# Altium PCB Main.PcbDoc
Units mm, origin at the board's own origin, x right, y up, seen from the top; angles counter-clockwise.
Board outline 30.8 x 30.8 mm, 2 copper layers (Top Layer, Bottom Layer); 34 components, 43 nets, 119 pads, 73 vias.
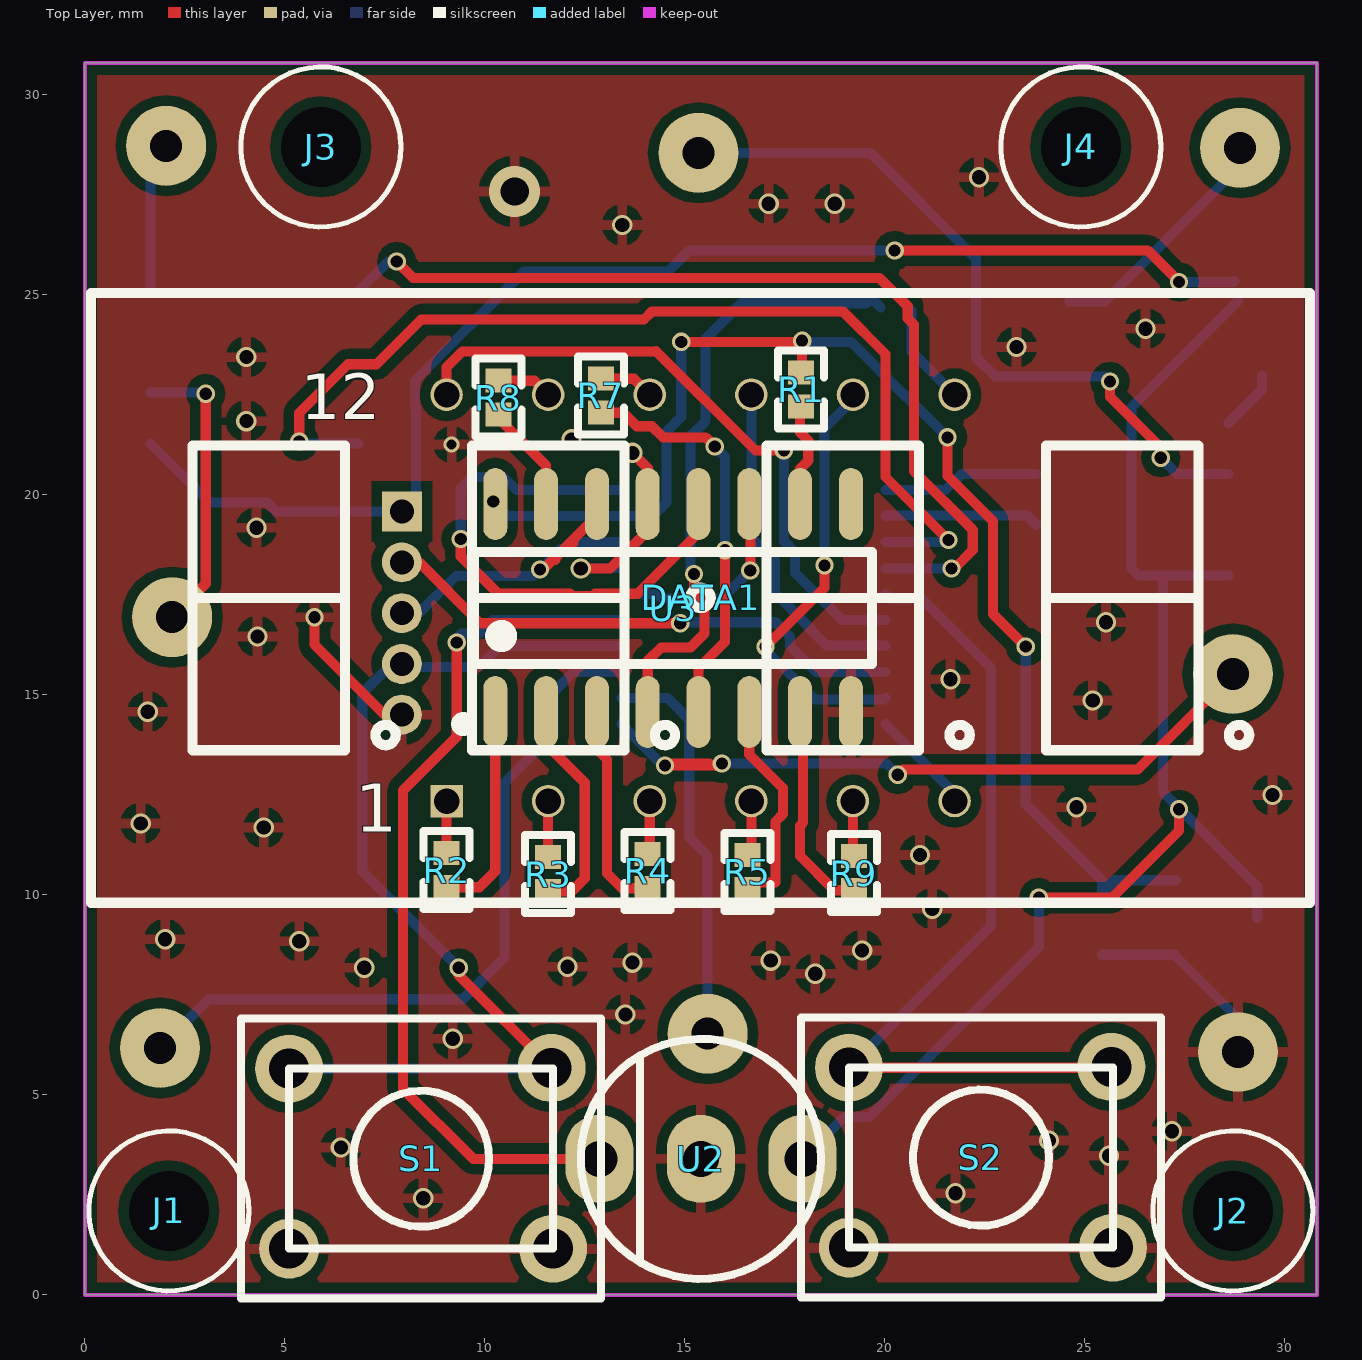
[diagram p0: Top Layer view]
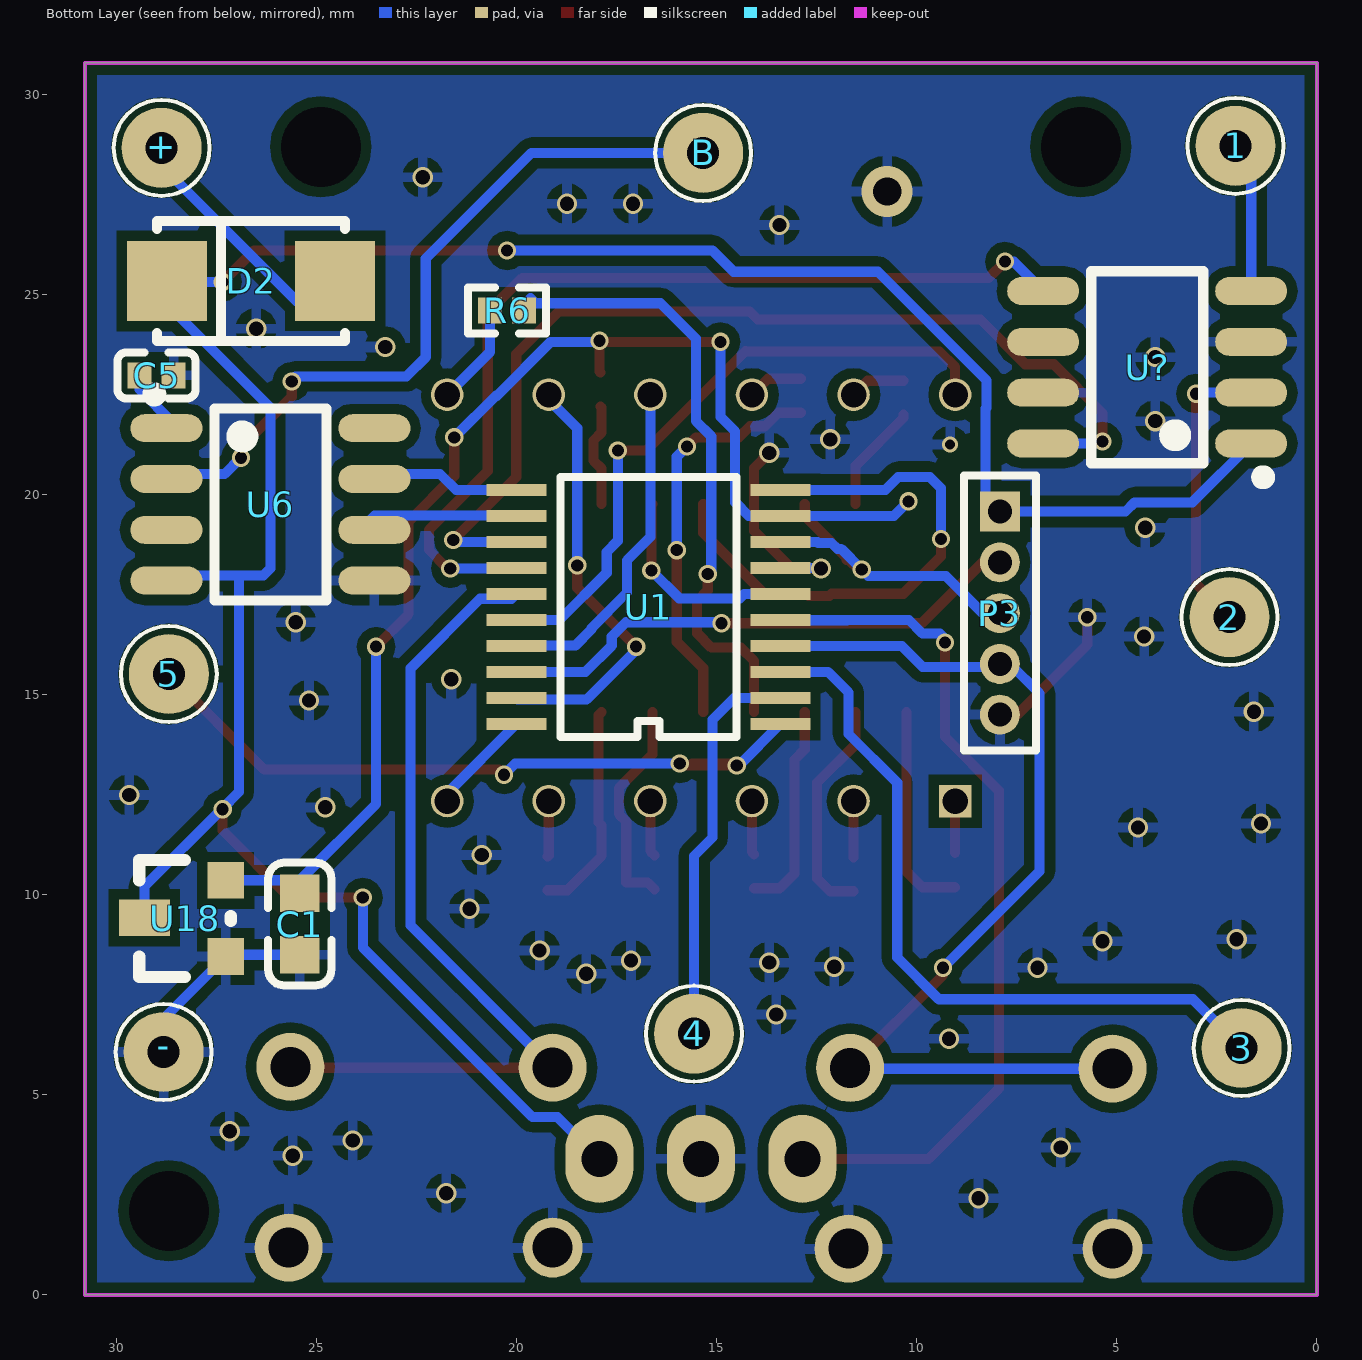
[diagram p1: Bottom Layer view, seen from below]
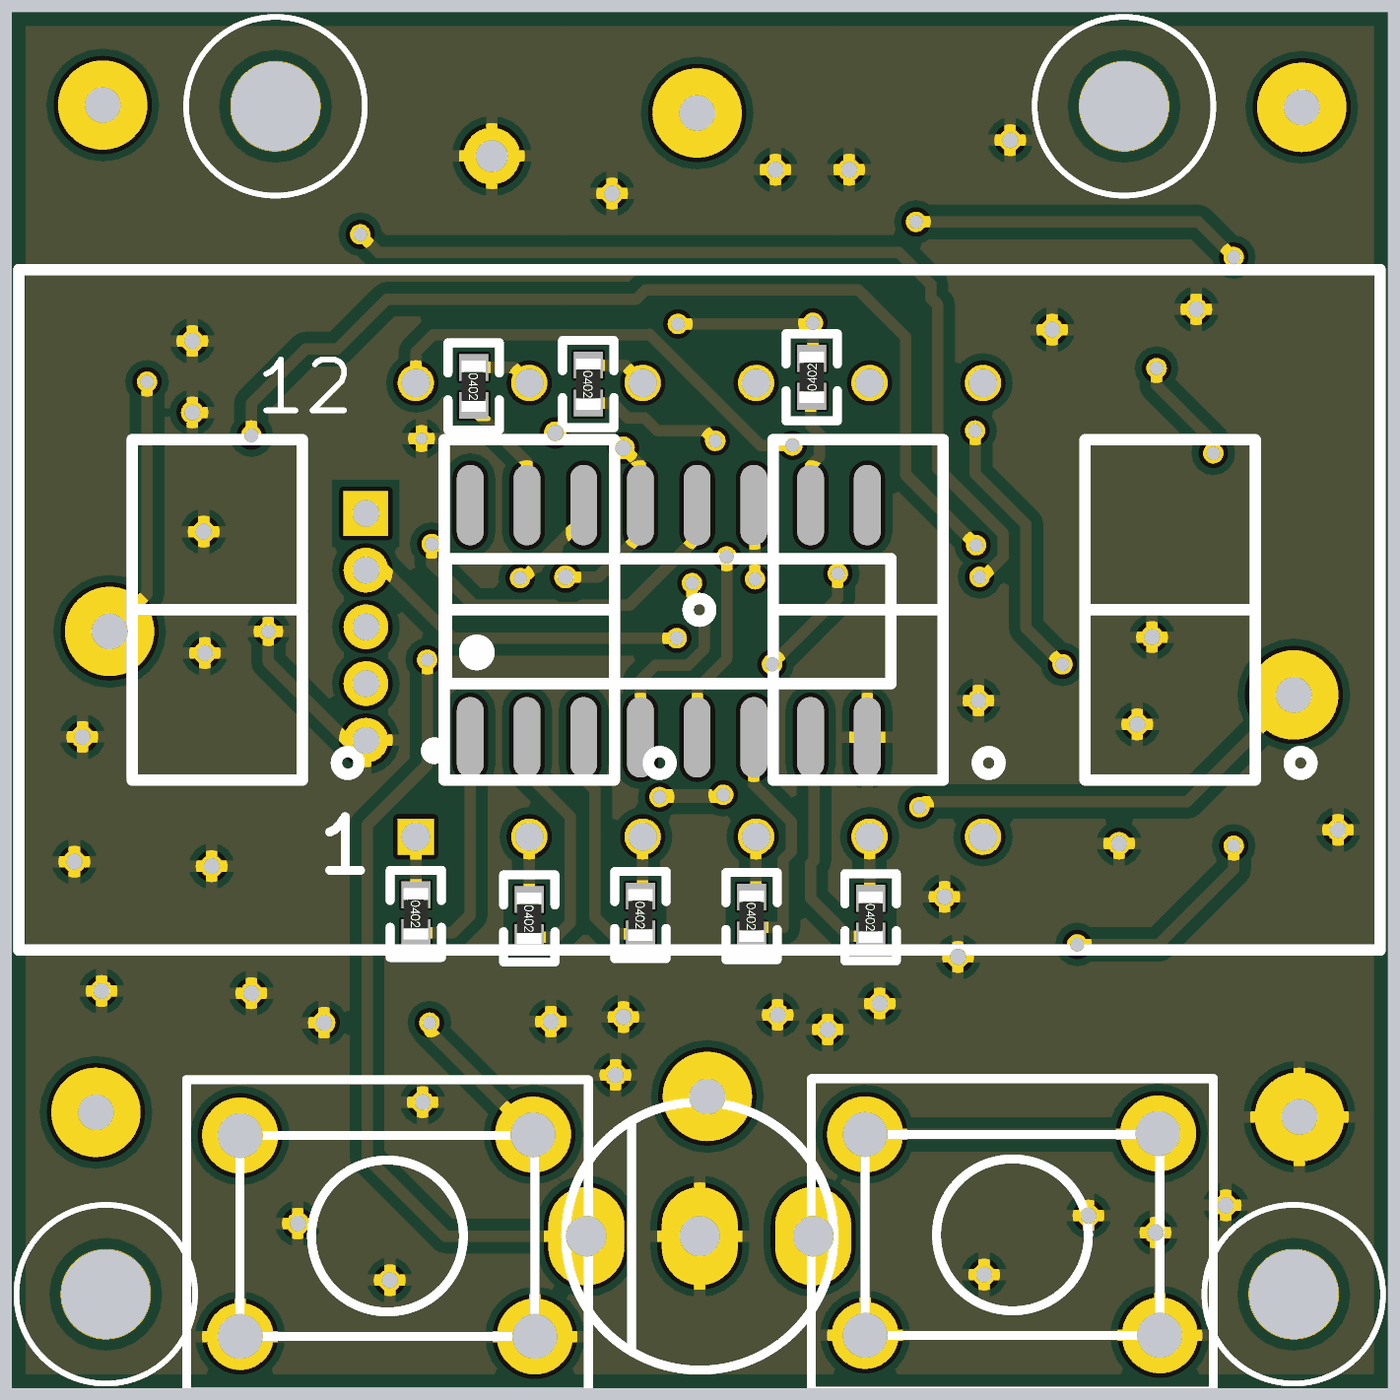
[diagram p2: 3D render of the assembled board from above, using the file's embedded part models]

## Layer stack, top to bottom
Top Solder: solder mask 0.0102, Solder Resist, Dk 3.5
Top Layer: signal copper 0.0356
Dielectric 1: dielectric 0.32, FR-4, Dk 4.8
Bottom Layer: signal copper 0.0356
Bottom Solder: solder mask 0.0102, Solder Resist, Dk 3.5

## Board outline
0,30.8 30.8,30.8 30.8,0 0,0

## Design rules (kind name [scope] priority, off if disabled: settings)
Clearance [All] p1: gap=0.254
PolygonConnect [All] p1: connectstyle=Relief reliefconductorwidth=0.254 reliefentries=4 polygonreliefangle="90 Angle" airgapwidth=0.254
RoutingVias [All] p1: holewidth=0.305 width=0.457 viastyle="Through Hole" minholewidth=0.305 minwidth=0.457 maxholewidth=0.305 maxwidth=0.457
SolderMaskExpansion [All] p1: expansion=0.102
Width [All] p1: maxlimit=0.254 minlimit=0.254 preferedwidth=0.254
30 further rules are at their usual default settings.

## Components (designator, comment, footprint, x,y, rotation, side; value= is the part's Value field where it differs from the comment)
1 "Socket" MODULE-PAD$2F$3 2.032,28.727 r180 bottom
2 "Socket" MODULE-PAD$2F$3 2.184,16.942 r180 bottom
3 "Socket" MODULE-PAD$2F$3 1.88,6.172 r180 bottom
4 "Socket" MODULE-PAD$2F$3 15.57,6.528 r180 bottom
5 "Socket" MODULE-PAD$2F$3 28.702,15.519 r180 bottom
+ "Socket" MODULE-PAD$2F$3 28.88,28.677 r180 bottom
- "Socket" MODULE-PAD$2F$3 28.829,6.071 r180 bottom
B "Socket" MODULE-PAD$2F$3 15.342,28.55 r180 bottom
C1 "10uF (106) 10% 10V" 0603_C 25.425,9.271 r90 bottom
C5 "100nF (104) 10% 16V" 0402_C 29.007,22.987 r180 bottom
D2 "SS54" SMA(DO-214AC)_S1 26.645,25.349 r180 bottom
DATA1 "LN3461AX" DIP12:DISP2 15.392,17.424 r0 top
J1 "Socket" FPAD_1 2.1,2.1 r0 top
J2 "Socket" FPAD_1 28.7,2.1 r0 top
J3 "Socket" FPAD_1 5.9,28.7 r0 top
J4 "Socket" FPAD_1 24.9,28.7 r0 top
P3 "MHDR1X5" MHDR1X5 7.925,19.583 r270 bottom
R1 "2.2KΩ (2201) ±1%" 0402_R 17.907,22.631 r90 top
R2 "1k" 0402_R 9.042,10.617 r270 top
R3 "1k" 0402_R 11.582,10.516 r270 top
R4 "1k" 0402_R 14.072,10.592 r270 top
R5 "1k" 0402_R 16.561,10.566 r270 top
R6 "1k" 0402_R 20.244,24.613 r180 bottom
R7 "1k" 0402_R 12.903,22.479 r270 top
R8 "1k" 0402_R 10.338,22.428 r270 top
R9 "1k" 0402_R 19.228,10.541 r270 top
S1 "SW-PB" SB1$2F$2 8.407,3.404 r270 top
S2 "SW-PB" SB1$2F$2 22.403,3.429 r270 top
U1 "N76E003AQ20" TSSOP20 16.713,17.196 r0 bottom
U2 "VS1838" LF0038Q 15.4,3.4 r0 top
U3 "74HC595D" SOIC-16_150mil 14.707,17.17 r0 top
U6 "JQ" SOIC-8_150mil 26.162,19.761 r270 bottom
U18 "AP2121-3.3" SOT-23 27.28,8.458 r270 bottom
U? "MX6208" SOIC-8_150mil 4.242,23.19 r90 bottom

## Footprints (in the part's own frame and the unit in brackets; to place one, negate y for a bottom-side part, rotate by r counter-clockwise, add the part's x,y. Pads: shape width x height; smd on the part's side, far side on the other; paste and mask are expansions set on the pad)
0402_C [mm]
  rect 0.6x0.65 smd mask+0.051: 1(-0.425,0) 2(0.425,0)
  silkscreen extent -0.97,-0.58 0.97,0.58, body extent -0.48,-0.3 0.52,0.3, height 0.2
0402_R [mm]
  rect 0.6x0.65 smd mask+0.051: 1(-0.425,0) 2(0.425,0)
  silkscreen extent -0.97,-0.58 0.97,0.58, body extent -0.58,-0.27 0.58,0.28, height 0.41
0603_C [mm]
  rect 0.93x0.98 smd: 1(-0.77,0) 2(0.77,0)
  silkscreen extent -1.53,-0.79 1.54,0.79, body extent -0.8,-0.4 0.8,0.4, height 0.3
DIP12:DISP2 [mil]
  rect 32x32 hole 25: 1(-250,-200)
  round 32 hole 25: 2(-150,-200) 3(-50,-200) 4(50,-200) 5(150,-200) 6(250,-200) 7(250,200) 8(150,200) 9(50,200) 10(-50,200) 11(-150,200) 12(-250,200)
  silkscreen extent -600,-300 600,300
FPAD_1 [mil]
  round 60 hole 78.74: 1(0,0)
LF0038Q [mm]
  oval 1.7x2.2 hole 0.9: 1(-2.54,0) 2(0,0) 3(2.54,0)
  silkscreen extent -3,-3 3,3
MHDR1X5 [mm] "Connector; Header; 5 Position"
  rect 1x1 hole 0.6: 1(0,0)
  round 1 hole 0.6: 2(1.27,0) 3(2.54,0) 4(3.81,0) 5(5.08,0)
  silkscreen extent -0.9,-0.9 5.98,0.9
MODULE-PAD$2F$3 [mm]
  round 2 hole 0.8: 1(0,0)
  silkscreen extent -1.2,-1.2 1.2,1.2
SB1$2F$2 [mm]
  round 1.7 hole 1: 1(-2.27,3.26) 1(-2.25,-3.3) 2(2.25,3.3)
  round 1.5 hole 1: 2(2.25,-3.3)
  silkscreen extent -3.5,-4.5 3.5,4.5
SMA(DO-214AC)_S1 [mm]
  rect 2x2 smd: 1(2.1,0) 2(-2.1,0)
  silkscreen extent -2.35,-1.5 2.35,1.5
SOIC-8_150mil [mm] "SOIC, 8-Leads, Body 4.9x3.9mm, Pitch 1.27mm, IPC Medium Density"
  oval 0.7x1.8 smd: 1(-1.905,-2.6) 2(-0.635,-2.6) 3(0.635,-2.6) 4(1.905,-2.6) 5(1.905,2.6) 6(0.635,2.6) 7(-0.635,2.6) 8(-1.905,2.6)
  silkscreen extent -2.9,-3.05 2.4,1.4
SOIC-16_150mil [mm]
  oval 0.6x1.8 smd: 1(-4.445,-2.6) 2(-3.175,-2.6) 3(-1.905,-2.6) 4(-0.635,-2.6) 5(0.635,-2.6) 6(1.905,-2.6) 7(3.175,-2.6) 8(4.445,-2.6) 9(4.445,2.6) 10(3.175,2.6) 11(1.905,2.6) 12(0.635,2.6) 13(-0.635,2.6) 14(-1.905,2.6) 15(-3.175,2.6) 16(-4.445,2.6)
  silkscreen extent -5.4,-3.05 4.97,1.4
SOT-23 [mil]
  rect 36x36 smd: 1(0,0) 2(-75,0)
  rect 36x50 smd: 3(-38,-80)
  silkscreen extent -95,-85 20,5, body extent -94,-89 24,9, height 42
TSSOP20 [mm]
  rect 1.5x0.3 smd: 1(-3.3,2.925) 2(-3.3,2.275) 3(-3.3,1.625) 4(-3.3,0.975) 5(-3.3,0.325) 6(-3.3,-0.325) 7(-3.3,-0.975) 8(-3.3,-1.625) 9(-3.3,-2.275) 10(-3.3,-2.925) 11(3.3,-2.925) 12(3.3,-2.275) 13(3.3,-1.625) 14(3.3,-0.975) 15(3.3,-0.325) 16(3.3,0.325) 17(3.3,0.975) 18(3.3,1.625) 19(3.3,2.275) 20(3.3,2.925)
  silkscreen extent -2.2,-3.25 2.2,3.25

## Part data
C1: library part "0603 10uF (106) 10% 10V", "贴片电容"
C5: library part "0402 100nF (104) 10% 16V", "贴片电容"
D2: library part "SMA(DO-214AC) SS54", "二极管"
DATA1: library part DATA04, "data?"
P3: "Header, 5-Pin"
R1 R2 R3 R4 R5 R6 R7 R8 R9: library part "0402 2.2KΩ (2201) 1%", "贴片电阻"
S1 S2: "Switch"
U2: library part RF, "1838 接收头 VS1838 VS1838B"
U3: "74系列逻辑芯片"
U18: library part AP2121-3, "3V LDO"

## Via types
v1: diameter 0.508, hole 0.356, Top Layer to Bottom Layer, 39 vias
v2: diameter 0.457, hole 0.305, Top Layer to Bottom Layer, 32 vias
v3: diameter 0.4, hole 0.254, Top Layer to Bottom Layer, 1 vias
v4: diameter 1.27, hole 0.711, Top Layer to Bottom Layer, 1 vias

## Nets (pads, with @x,y where several pads share a name; then routed paths per layer and width w, separated by ;. In a path a pad name is that pad's centre, name@x,y a point inside that pad or via, vN(x,y) a via of type N, cw(c..) or ccw(c..) an arc to the next point about the centre after c; other vN are vias at no path point)
+3V: C1.2 R1.2 U1.9 U3.16 U18.2 | length 32.2
  Top Layer w0.254: v2(14.91,23.825) 17.907,23.825 v2(17.932,23.851) 17.932,23.082 R1.2 ; v2(21.565,21.438) 21.565,20.477 22.706,19.335 22.706,17.019 v2(23.52,16.205)
  Bottom Layer w0.254: v2(10.211,19.837) 10.577,19.471 U1.9 14.202,19.471 14.544,19.813 14.544,21.586 14.91,21.951 v2(14.91,23.825) ; v2(17.932,23.851) 17.958,23.825 19.152,23.825 20.498,22.479 20.523,22.479 v2(21.565,21.438) ; v2(23.52,16.205) 23.52,12.268 25.425,10.363 C1.2 25.748,10.363 U18.2
+3V3: D2.2 P3.1 U2.3 U6.4 U18.3 U?.1 | length 66.5
  Top Layer w0.254: v2(20.244,26.111) 26.568,26.111 v2(27.356,25.324) ; v2(23.851,9.931) 25.679,9.931 27.356,11.608 v2(27.356,12.141)
  Bottom Layer w0.254: U?.1 3.115,19.812 4.556,19.812 4.784,19.583 P3.1 8.28,19.939 8.28,22.153 8.255,22.178 8.255,22.86 10.973,25.578 14.58,25.578 15.113,26.111 v2(20.244,26.111) ; U2.3 18.988,4.448 19.613,4.448 23.851,8.686 v2(23.851,9.931) ; v2(27.356,12.141) v2@27.368,12.154 ; v2(27.356,25.324) 28.719,25.324 D2.2 ; U6.4@28.587,17.983 26.949,17.983 ; D2.2@28.821,24.841 26.162,22.182 26.162,18.161 26.34,17.983 26.949,17.983 ; U18.3 29.312,10.211 v2@27.368,12.154 ; 26.949,17.983 26.949,12.573 v2@27.368,12.154
CLK: P3.2 U1.18 | length 13.4
  Top Layer w0.254: P3.2 8.357,18.313 9.881,16.789 v2(14.884,16.789)
  Bottom Layer w0.254: v2(14.884,16.789) 14.91,16.815 17.271,16.815 17.628,16.458 17.628,16.231 18.287,15.571 U1.18
DAT: P3.3 U1.8 U3.14 | length 9.6
  Top Layer w0.254: v2(11.379,18.136) v2@11.46,18.136 ; 12.213,18.796 12.132,18.796 11.76,18.424 11.76,18.375 11.699,18.375 v2@11.46,18.136 ; U3.14 12.802,19.477 v2@11.46,18.136
  Bottom Layer w0.254: P3.3 8.351,17.043 9.278,17.97 11.214,17.97 v2(11.379,18.136) 11.892,18.649 11.985,18.649 12.132,18.796 12.467,18.796 12.492,18.821 U1.8
GND: -.1 C1.1 C5.2 P3.5 S1.2 S2.2 U1.7 U2.2 U3.8 U3.13 U6.5 U18.1 U?.3 U?.7 | length 13.8
  Top Layer w0.254: v2(5.74,16.942) 5.74,16.256 7.493,14.503 P3.5 ; v1@12.344,18.136 12.37,18.161 v1(12.395,18.161) 13.132,18.161 14.072,19.101 U3.13 14.072,20.668 v1(13.691,21.049)
  Bottom Layer w0.254: v2@5.74,16.916 v2(5.74,16.942) ; v1(12.395,18.161) 12.405,18.171 U1.7 ; C1.1 27.237,8.501 U18.1 28.829,6.909 -.1
  other v1: 8.458,2.413 21.768,2.54 25.603,3.48 6.401,3.683 24.105,3.861 27.178,4.089 9.195,6.401 13.513,7.01 18.263,8.026 6.985,8.179 12.065,8.204 13.691,8.306 17.145,8.357 19.431,8.611 5.359,8.839 2.007,8.89 21.184,9.652 20.879,10.998 4.47,11.684 1.397,11.786 24.79,12.192 29.693,12.497 1.575,14.58 25.197,14.859 21.641,15.392 4.318,16.459 25.527,16.815 4.293,19.177 12.167,21.387 4.039,21.844 4.039,23.444 23.292,23.698 26.518,24.155 13.437,26.746 17.094,27.28 18.745,27.28 22.352,27.94
  other v3: 9.169,21.26
  other v4: 10.744,27.584
INT0: U1.5 U2.1 | length 21.8
  Top Layer w0.254: v2(9.296,16.307) 9.296,13.95 7.95,12.604 7.95,5.156 9.706,3.4 U2.1
  Bottom Layer w0.254: v2(9.296,16.307) 9.296,16.408 9.423,16.535 9.862,16.535 10.198,16.871 11.748,16.871 11.753,16.866 13.408,16.866 U1.5
KEY1: S2.1 U1.15 | length 21.4
  Top Layer w0.254: S2.1@19.103,5.679 25.643,5.679 S2.1@25.663,5.699
  Bottom Layer w0.254: S2.1@19.103,5.679 22.657,9.233 22.657,15.666 20.921,17.402 20.132,17.402 U1.15
Net1_1: 1.1 U?.4 | length 3.2
  Bottom Layer w0.254: U?.4 1.1@1.642,28.337
Net2_1: 2.1 U?.2 | length 7.4
  Top Layer w0.254: 2.1 3.023,17.78 v2(3.023,22.53)
  Bottom Layer w0.254: U?.2 2.997,22.555 v2(3.023,22.53) ; 2.1@2.124,17.002 2.1
Net5_1: 5.1 U1.1 | length 18
  Top Layer w0.254: 15.614,13.284 14.554,13.284 v2(14.501,13.231) 15.873,13.231 v2(15.926,13.284) ; v2(20.32,13.005) 20.447,13.132 26.314,13.132 5.1
  Bottom Layer w0.254: U1.1 14.453,13.231 v2(14.501,13.231) ; v2(15.926,13.284) 20.041,13.284 v2(20.32,13.005)
Net+_1: +.1 D2.1 | length 6.1
  Bottom Layer w0.254: D2.1@24.621,24.841 25.502,24.841 28.88,28.219 +.1
NetB_1: B.1 U6.2 | length 18.4
  Top Layer w0.254: v2(25.629,22.835) 25.629,22.454 26.899,21.184 v2(26.899,20.93)
  Bottom Layer w0.254: B.1 19.634,28.55 22.276,25.908 22.276,23.444 22.758,22.962 25.527,22.962 25.654,22.835 v2(25.629,22.835) ; v2(26.899,20.93) 27.305,20.523 U6.2@28.587,20.523
NetC5_1: C5.1 U6.1 | length 1.5
  Bottom Layer w0.254: U6.1@28.587,21.793 29.432,22.638 C5.1
NetDATA1_1: DATA1.1 R2.1 | length 1.3
  Top Layer w0.254: R2.1 DATA1.1
NetDATA1_2: DATA1.2 R3.1 | length 1.4
  Top Layer w0.254: R3.1 DATA1.2
NetDATA1_3: DATA1.3 R4.1 | length 1.3
  Top Layer w0.254: R4.1 14.122,11.068 DATA1.3
NetDATA1_4: DATA1.4 R5.1 | length 1.4
  Top Layer w0.254: R5.1 16.662,11.093 DATA1.4
NetDATA1_5: DATA1.5 R9.1 | length 1.4
  Top Layer w0.254: DATA1.5 19.202,10.991 R9.1
NetDATA1_7: DATA1.7 R6.1 | length 2.6
  Bottom Layer w0.254: R6.1 20.669,23.578 DATA1.7
NetDATA1_10: DATA1.10 R7.1 | length 1.4
  Top Layer w0.254: R7.1 13.723,22.904 DATA1.10
NetDATA1_11: DATA1.11 R8.1 | length 1.4
  Top Layer w0.254: R8.1 11.233,22.853 DATA1.11
NetR1_1: R1.1 U3.10 | length 2.6
  Top Layer w0.254: U3.10 17.882,20.652 18.085,20.855 18.085,21.36 17.882,21.563 17.882,22.181 R1.1
P0.0: DATA1.12 U1.16 | length 16.2
  Top Layer w0.254: DATA1.12 9.042,23.19 9.437,23.585 14.265,23.585 14.276,23.597 16.765,21.107 v2(17.475,21.107)
  Bottom Layer w0.254: v2(17.475,21.107) 17.475,18.853 17.755,18.573 17.755,18.05 18.934,16.871 U1.16
P0.1: DATA1.9 U1.17 | length 8.5
  Bottom Layer w0.254: DATA1.9 16.662,18.947 17.247,18.363 17.247,17.557 18.136,16.668 18.136,16.637 18.542,16.231 20.003,16.231 U1.17
P0.3: DATA1.8 U1.19 | length 10.8
  Top Layer w0.254: v2(17.018,16.205) 18.491,17.678 v2(18.491,18.237)
  Bottom Layer w0.254: v2(17.018,16.205) 17.018,16.122 18.255,14.884 19.977,14.884 U1.19 ; v2(18.491,18.237) 18.491,21.666 19.202,22.377 DATA1.8
P0.4: DATA1.6 U1.20 | length 2.6
  Bottom Layer w0.254: U1.20 21.742,12.542 DATA1.6
P1.3: U1.12 U6.6 | length 3.9
  Bottom Layer w0.254: U1.12 20.024,19.482 23.559,19.482 U6.6@23.787,19.253
P1.4: U1.11 U6.7 | length 3.9
  Bottom Layer w0.254: U1.11 21.518,20.121 21.92,20.523 U6.7@23.787,20.523
P1.5: U1.10 U3.12 | length 13.7
  Top Layer w0.254: v2(9.398,18.898) 9.398,18.466 10.338,17.526 11.938,17.526 12.132,17.526 12.183,17.475 12.709,17.475 12.76,17.526 13.818,17.526 15.342,19.05 U3.12
  Bottom Layer w0.254: v2(9.398,18.898) 9.398,20.168 9.677,20.447 10.463,20.447 10.79,20.121 U1.10
P1.7: U1.6 U3.11 | length 5.2
  Top Layer w0.254: U3.11 16.637,19.745 v2(16.637,18.11)
  Bottom Layer w0.254: U1.6 14.319,17.521 14.427,17.412 15.939,17.412 v2(16.637,18.11)
PWM1: U1.13 U?.8 | length 25.4
  Top Layer w0.254: v2(5.359,21.336) 5.359,22.047 6.579,23.266 7.29,23.266 8.407,24.384 13.979,24.384 14.182,24.587 18.948,24.587 20.015,23.52 20.015,20.446 v2(21.589,18.872)
  Bottom Layer w0.254: v2(5.359,21.336) 5.41,21.285 U?.8 ; U1.13 21.64,18.821 v2(21.589,18.872)
PWM2: U1.14 U?.5 | length 23.6
  Top Layer w0.254: v2(7.798,25.832) 8.204,25.425 19.863,25.425 20.574,24.714 20.574,24.409 20.726,24.257 20.726,20.597 22.198,19.125 22.198,18.62 21.74,18.161 v2(21.666,18.161)
  Bottom Layer w0.254: U?.5 7.578,25.832 v2(7.798,25.832) ; U1.14 20.023,18.161 v2(21.666,18.161)
RST: P3.4 S1.1 U1.4 | length 24.9
  Top Layer w0.254: v2(9.347,8.179) 9.347,7.994 S1.1@11.667,5.674
  Bottom Layer w0.254: S1.1@5.107,5.654 11.647,5.654 S1.1@11.667,5.674 ; v2(9.347,8.179) 6.934,10.592 6.934,15.037 7.671,15.773 P3.4 8.001,15.697 9.855,15.697 10.379,16.221 U1.4
RXD: 3.1 U1.3 | length 18.6
  Bottom Layer w0.254: 3.1 3.099,7.391 9.449,7.391 10.49,8.433 10.49,12.802 11.709,14.021 11.709,15.062 12.218,15.571 U1.3
SEG1: R8.2 U3.15 | length 2.7
  Top Layer w0.254: R8.2 10.338,21.92 11.532,20.726 U3.15
SEG2: R2.2 U3.1 | length 5.4
  Top Layer w0.254: R2.2 9.862,10.192 10.262,10.592 U3.1
SEG3: R3.2 U3.2 | length 5.6
  Top Layer w0.254: U3.2 11.532,13.767 12.497,12.802 12.497,10.414 12.173,10.091 R3.2
SEG4: R4.2 U3.3 | length 5.3
  Top Layer w0.254: U3.3 12.802,13.64 13.056,13.386 13.056,10.541 13.43,10.167 R4.2
SEG5: R6.2 U3.4 | length 15.5
  Top Layer w0.254: U3.4 14.072,15.85 14.402,16.18 15.137,16.18 15.494,16.537 15.494,17.347 15.227,17.614 v2(15.227,18.022)
  Bottom Layer w0.254: v2(15.227,18.022) 15.138,18.11 15.138,21.462 15.519,21.843 15.519,23.901 16.408,24.79 19.533,24.79 19.66,24.917 R6.2@19.895,24.682
SEG6: R7.2 U3.5 | length 10.2
  Top Layer w0.254: R7.2 13.459,22.054 13.796,21.717 14.173,21.717 14.453,21.438 15.519,21.438 v2(15.748,21.209) ; U3.5 15.342,15.666 16.002,16.326 v2(16.002,18.618)
  Bottom Layer w0.254: v2(15.748,21.209) 16.002,20.955 v2(16.002,18.618)
SEG7: R5.2 U3.6 | length 5.5
  Top Layer w0.254: R5.2 16.73,10.31 17.267,10.31 17.267,11.835 17.45,12.018 17.45,12.67 16.612,13.509 U3.6
SEG8: R9.2 U3.7 | length 5.4
  Top Layer w0.254: U3.7 17.958,14.494 17.958,11.808 17.882,11.732 17.882,10.973 18.738,10.116 R9.2
TXD: 4.1 U1.2 | length 10
  Bottom Layer w0.254: U1.2 14.569,14.921 15.111,14.378 15.111,11.432 15.57,10.973 4.1
pads on no net: J1.1 J2.1 J3.1 J4.1 U3.9 U6.3 U6.8 U?.6

## Polygon pours and split planes (outlines as drawn)
GND on Top Layer "Top Layer-No Net" (solid, remove dead copper, pour order 2): -5.043,36.558 -3.773,35.288 -3.773,-4.311 39.509,-4.311 43.522,-0.297 33.082,10.142 33.082,35.288
GND on Bottom Layer "Top Layer-No Net" (solid, remove dead copper, pour order 4): -2.235,33.426 34.366,33.426 34.163,33.223 34.163,-4.953 -3.353,-4.953 -3.835,-5.436

## Keep-outs
Keep-Out Layer:
  the board outline again, w0.1

## Silkscreen, mask and mechanical layers (free items; w line width, h text height)
Top Overlay:
  circle w0.127: c28.7,2.1 r2
  circle w0.127: c5.9,28.7 r2
  circle w0.127: c24.9,28.7 r2
  circle w0.127: c2.1,2.1 r2

## Text inside footprints (layer, text, board x,y; h text height)
DATA1: Top Overlay "12" at 5.392,21.884 h1.14; Top Overlay "1" at 6.756,11.582 h1.2